# Altium PCB STM_System_Board.PCBDOC (part 15 of 16)
Units mm, origin at the board's own origin, x right, y up, seen from the top; angles counter-clockwise.
Board outline 222.53 x 100.01 mm, 6 copper layers (Top Layer, Int1 (GND), Int2 (Sign), Layer 1, Layer 2, Bottom Layer), stack 1.526 mm thick; 702 components, 774 nets, 3596 pads, 1988 vias.
Unrouted connection lines stored in the file: 1.
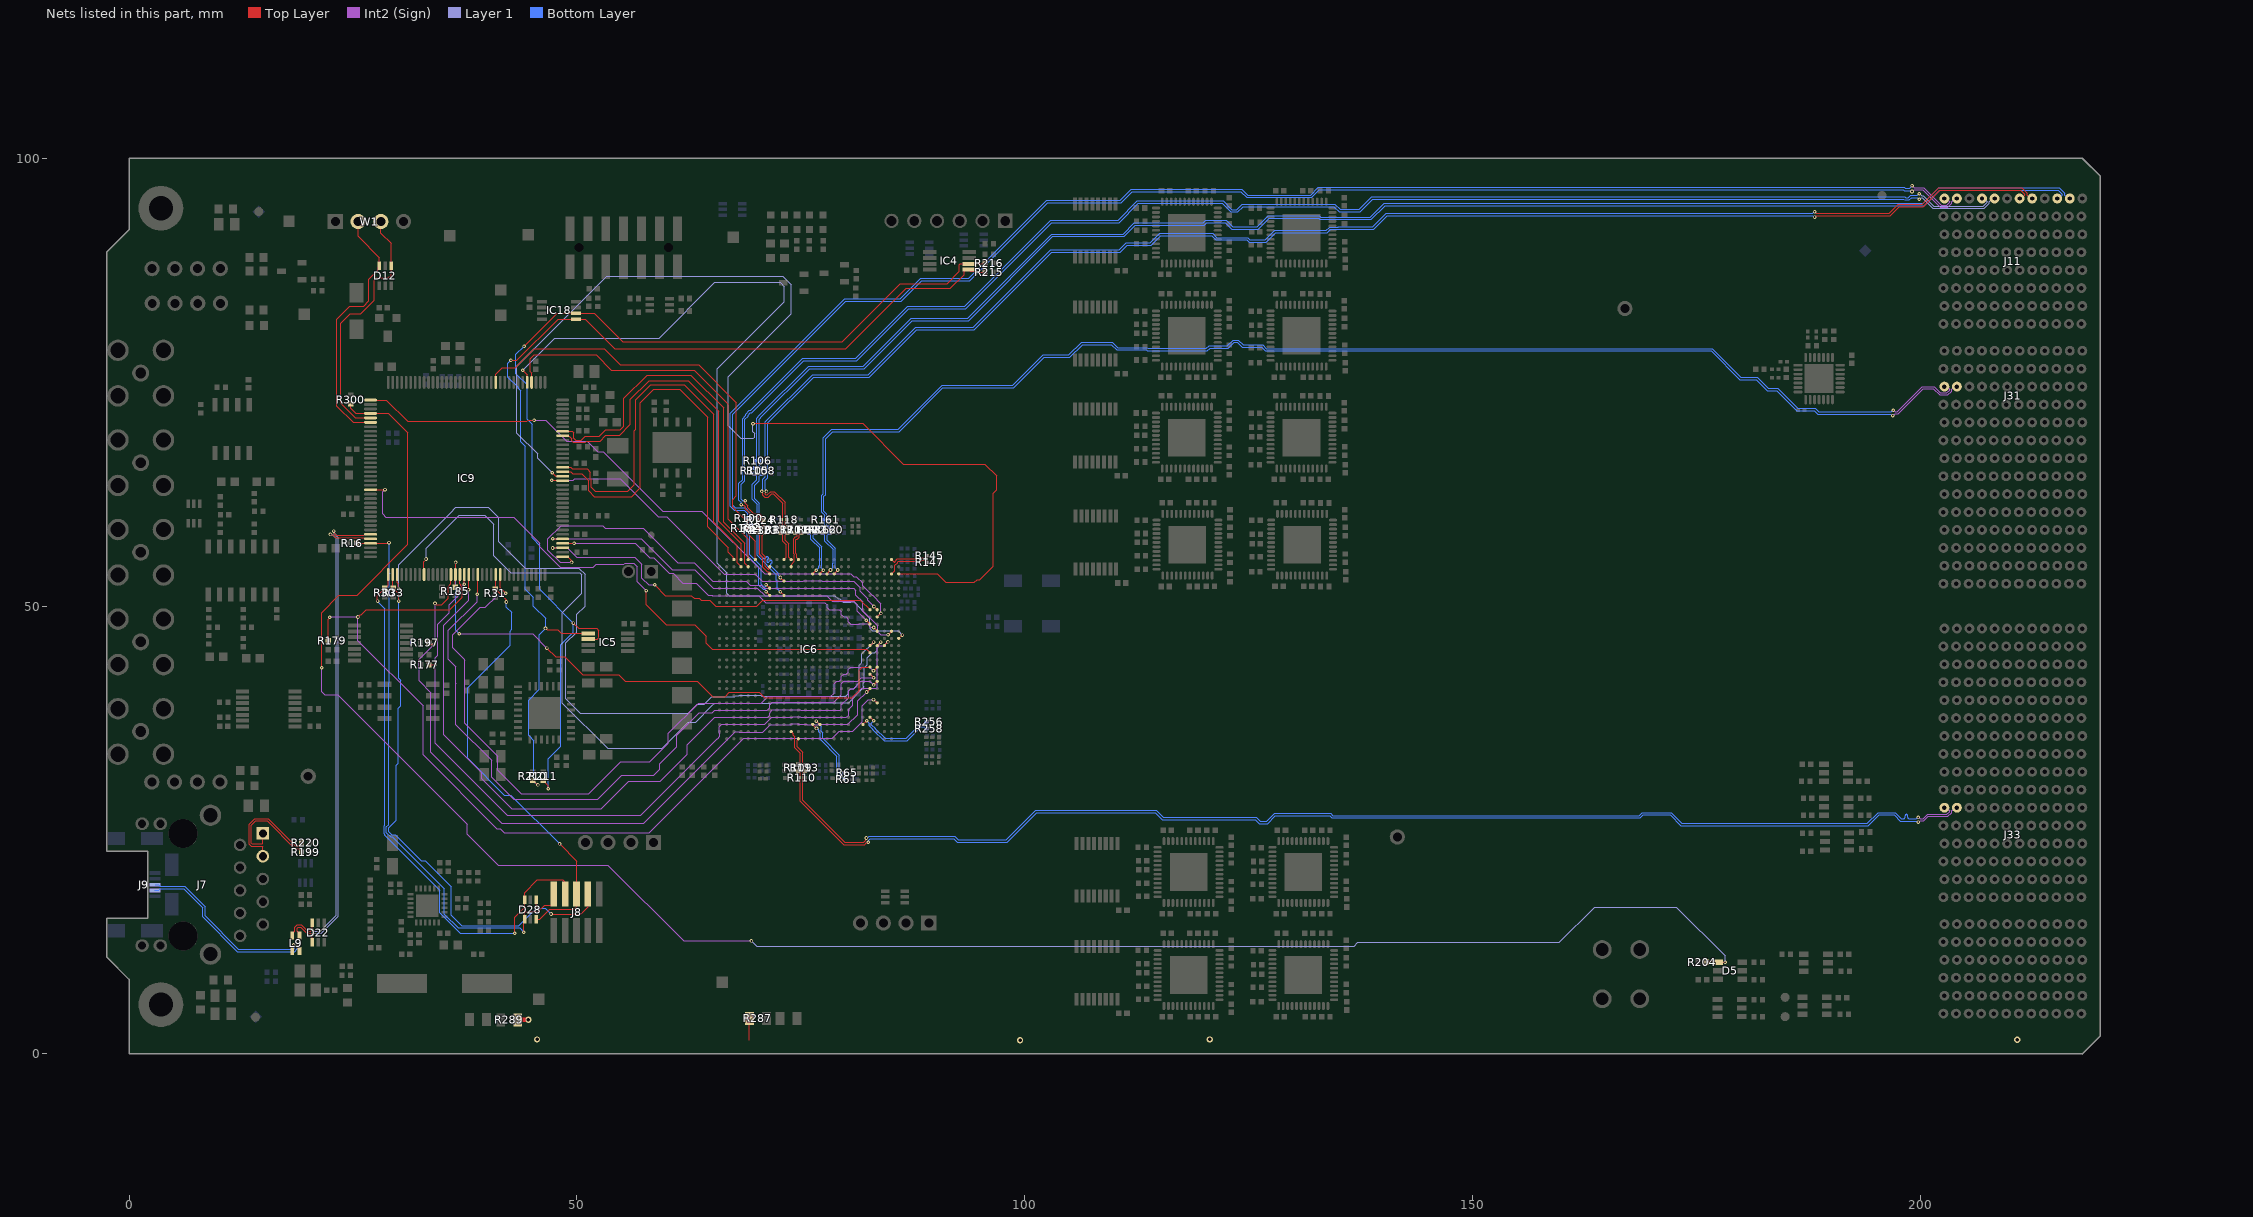
[diagram p18: the nets of this part, all layers, seen from the top]

## Via types
v1: diameter 0.4, hole 0.2, Top Layer to Bottom Layer, tented both sides, 1806 vias
v2: diameter 0.7, hole 0.4, Top Layer to Bottom Layer, tented both sides, 92 vias
v3: diameter 0.7, hole 0.4, Top Layer to Bottom Layer, 90 vias

## Nets (pads, with @x,y where several pads share a name; then routed paths per layer and width w, separated by ;. In a path a pad name is that pad's centre, name@x,y a point inside that pad or via, vN(x,y) a via of type N, cw(c..) or ccw(c..) an arc to the next point about the centre after c; other vN are vias at no path point) (continued)
SLOT8.LVDS_10_N: J31.L4 R161.1 R162.2 | length 147.1
  Int2 (Sign) w0.102: v1(196.925,71.865) 196.968,71.865 197.159,71.675 197.375,71.675 200.19,74.49 201.502,74.49 202.204,73.788 202.93,73.788 203.232,74.09 203.232,74.174 203.172,74.233 203.166,74.233 202.909,74.49 J31.L4@202.639,74.49
  Bottom Layer w0.095: R162.2@77.419,58.828 77.419,58.848 77.582,59.011 77.587,59.011 77.643,59.066 77.643,59.422 77.628,59.436 77.628,59.477 R161.1@77.466,59.64 ; R161.1@77.446,59.64 R161.1@77.466,59.64 ; v1(196.925,71.865) 196.88,71.865 196.708,71.694 188.606,71.694 188.225,72.075 186.25,72.075 184.036,74.289 182.989,74.289 181.735,75.542 179.925,75.542 176.725,78.742 126.962,78.742 126.562,79.142 124.385,79.142 123.84,79.687 123.248,79.687 122.616,79.055 120.558,79.055 120.253,78.749 113.781,78.749 113.678,78.853 110.341,78.853 109.745,79.449 106.324,79.449 104.9,78.026 102.023,78.026 98.623,74.625 90.748,74.625 85.849,69.726 78.449,69.726 77.484,68.761 77.484,62.536 77.3,62.352 77.3,60.483 77.643,60.141 77.643,59.858 77.628,59.844 77.628,59.802 R161.1@77.466,59.64
SLOT8.LVDS_10_P: J31.K4 R160.2 R161.2 | length 147.1
  Int2 (Sign) w0.102: v1(196.867,71.255) 196.948,71.255 197.153,71.461 197.464,71.461 200.279,74.276 201.413,74.276 202.116,73.574 203.018,73.574 203.446,74.001 203.446,74.174 203.505,74.233 203.512,74.233 203.769,74.49 J31.K4@204.039,74.49
  Bottom Layer w0.095: R161.2@78.106,59.64 R161.2@78.086,59.64 ; R160.2@78.189,58.828 78.189,58.848 78.026,59.011 77.993,59.011 77.909,59.094 77.909,59.422 77.923,59.436 77.923,59.477 R161.2@78.086,59.64 ; v1(196.867,71.255) 196.821,71.255 196.65,71.427 188.496,71.427 188.115,71.808 186.139,71.808 183.926,74.022 182.878,74.022 181.625,75.275 179.814,75.275 176.615,78.475 126.851,78.475 126.451,78.875 124.274,78.875 123.729,79.42 123.359,79.42 122.727,78.788 120.669,78.788 120.363,78.482 113.671,78.482 113.567,78.586 110.23,78.586 109.634,79.182 106.434,79.182 105.011,77.759 102.134,77.759 98.733,74.358 90.858,74.358 85.959,69.459 78.559,69.459 77.751,68.651 77.751,62.425 77.567,62.241 77.567,60.594 77.909,60.251 77.909,59.858 77.923,59.844 77.923,59.802 R161.2@78.086,59.64
SLOT8.LVDS_11_N: J11.C8 R106.1 R108.2 | length 163.5
  Bottom Layer w0.095: R106.1@70.519,66.192 R106.1@70.499,66.192 ; R108.2@70.589,65.416 70.589,65.436 70.427,65.599 70.398,65.599 70.322,65.675 70.322,65.974 70.337,65.988 70.337,66.029 R106.1@70.499,66.192 ; J11.C8@215.239,95.49 215.426,95.49 215.805,95.869 215.805,95.948 215.328,96.425 202.125,96.425 200.4,94.7 140.2,94.7 138.658,93.158 132.929,93.158 132.776,93.311 127.286,93.311 126.05,92.075 123.098,92.075 122.371,92.801 120.307,92.801 120.009,92.503 112.328,92.503 111.083,91.258 103.133,91.258 93.708,81.833 87.408,81.833 82.083,76.508 75.958,76.508 70.675,71.225 70.322,70.872 70.322,66.41 70.337,66.396 70.337,66.354 R106.1@70.499,66.192
SLOT8.LVDS_11_P: J11.B8 R105.2 R106.2 | length 164.4
  Bottom Layer w0.095: R105.2@69.828,65.419 69.828,65.439 69.991,65.601 70,65.601 70.056,65.657 70.056,65.974 70.042,65.988 70.042,66.029 R106.2@69.879,66.192 ; R106.2@69.859,66.192 R106.2@69.879,66.192 ; J11.B8@216.639,95.49 216.452,95.49 216.072,95.869 216.072,96.058 215.439,96.692 202.014,96.692 200.29,94.967 140.09,94.967 138.548,93.425 133.039,93.425 132.886,93.578 127.175,93.578 125.939,92.342 123.208,92.342 122.482,93.068 120.196,93.068 119.898,92.77 112.218,92.77 110.973,91.525 103.023,91.525 93.598,82.1 87.298,82.1 81.973,76.775 75.848,76.775 70.408,71.336 70.056,70.983 70.056,66.41 70.042,66.396 70.042,66.354 R106.2@69.879,66.192
SLOT8.LVDS_12_N: J11.F8 R118.1 R120.2 | length 167
  Top Layer w0.095: v1(71.147,62.8) 71.147,62.722 71.017,62.592 71.017,62.458 71.072,62.402 71.236,62.402 71.614,62.78 72.045,62.78 73.248,61.577 73.248,59.839 73.262,59.825 73.262,59.784 R118.1@73.425,59.621 ; R118.1@73.445,59.621 R118.1@73.425,59.621 ; R120.2@73.515,58.83 73.515,58.85 73.353,59.013 73.304,59.013 73.248,59.068 73.248,59.313 73.248,59.403 73.262,59.417 73.262,59.459 R118.1@73.425,59.621 ; v1(188.15,93.42) 188.192,93.42 188.358,93.587 188.437,93.587 188.44,93.584 188.909,93.584 188.91,93.585 188.942,93.585 188.943,93.587 196.614,93.587 197.602,94.575 200.277,94.575 202.102,96.4 211.153,96.4 211.605,95.948 211.605,95.869 211.226,95.49 J11.F8@211.039,95.49
  Bottom Layer w0.095: v1(71.147,62.8) 71.147,62.878 71.017,63.008 71.017,64.033 71.3,64.316 71.3,70.448 76.412,75.559 82.609,75.559 87.908,80.858 94.333,80.858 102.983,89.508 110.658,89.508 111.433,90.283 114.108,90.283 115.15,91.325 120.873,91.325 121.328,90.87 124.753,90.87 125.017,90.606 125.952,90.606 125.963,90.595 126.955,90.595 128.018,91.658 133.758,91.658 134.133,92.033 135.074,92.033 135.09,92.049 138.949,92.049 140.472,93.572 187.942,93.572 188.094,93.42 v1(188.15,93.42)
SLOT8.LVDS_12_P: J11.E8 R117.2 R118.2 | length 167.9
  Top Layer w0.095: v1(70.62,62.8) 70.62,62.722 70.75,62.592 70.75,62.347 70.962,62.135 71.347,62.135 71.725,62.513 71.935,62.513 72.982,61.466 72.982,59.839 72.967,59.825 72.967,59.784 R118.2@72.805,59.621 ; R117.2@72.715,58.83 72.715,58.85 72.878,59.013 72.926,59.013 72.982,59.068 72.982,59.203 72.982,59.403 72.967,59.417 72.967,59.459 R118.2@72.805,59.621 ; R118.2@72.785,59.621 R118.2@72.805,59.621 ; v1(188.15,94.02) 188.192,94.02 188.358,93.853 188.547,93.853 188.55,93.851 188.798,93.851 188.799,93.852 188.832,93.852 188.833,93.853 196.503,93.853 197.492,94.842 200.167,94.842 201.992,96.667 211.264,96.667 211.872,96.058 211.872,95.869 212.252,95.49 J11.E8@212.439,95.49
  Bottom Layer w0.095: v1(70.62,62.8) 70.62,62.878 70.75,63.008 70.75,64.143 71.033,64.427 71.033,70.558 76.301,75.826 82.499,75.826 87.798,81.125 94.223,81.125 102.873,89.775 110.548,89.775 111.323,90.55 113.998,90.55 115.039,91.592 120.983,91.592 121.438,91.137 124.863,91.137 125.128,90.872 126.063,90.872 126.073,90.862 126.844,90.862 127.907,91.925 133.648,91.925 134.023,92.3 134.963,92.3 134.979,92.316 138.839,92.316 140.362,93.839 187.936,93.839 188.117,94.02 v1(188.15,94.02)
SLOT8.LVDS_13_N: J11.I8 R124.1 R130.2 | length 166.3
  Top Layer w0.095: v1(68.35,61.325) 68.398,61.277 68.596,61.277 68.809,61.064 68.809,60.866 69.634,60.041 70.275,60.041 70.37,59.946 70.37,59.812 70.356,59.798 70.356,59.756 R124.1@70.193,59.594 ; R130.2@70.173,58.806 70.173,58.826 70.37,59.023 70.37,59.376 70.356,59.39 70.356,59.431 R124.1@70.193,59.594 ; R124.1@70.173,59.594 R124.1@70.193,59.594
  Layer 1 w0.102: v1(199.825,96.014) 199.863,96.014 200.099,95.777 200.273,95.777 201.45,94.6 206.978,94.6 207.432,95.054 207.432,95.138 207.08,95.49 J11.I8@206.839,95.49
  Bottom Layer w0.095: v1(68.35,61.325) 68.321,61.354 68.321,61.59 68.083,61.827 68.083,63.679 68.482,64.078 68.482,70.932 68.834,71.284 68.834,71.416 69.251,71.833 69.383,71.833 75.189,77.639 81.111,77.639 86.923,83.45 93.273,83.45 102.898,93.075 110.423,93.075 112.564,95.217 122.136,95.217 123.099,94.253 123.651,94.253 124.248,94.85 134.6,94.85 135.175,94.275 137.298,94.275 138.723,95.7 198.22,95.7 198.32,95.6 198.63,95.6 198.863,95.834 199.611,95.834 199.792,96.014 v1(199.825,96.014)
SLOT8.LVDS_13_P: J11.H8 R123.2 R124.2 | length 166.3
  Top Layer w0.095: v1(68.774,61.749) 68.804,61.72 68.804,61.446 69.076,61.174 69.076,60.976 69.744,60.308 70.385,60.308 70.637,60.057 70.637,59.812 70.651,59.798 70.651,59.756 R124.2@70.813,59.594 ; R124.2@70.833,59.594 R124.2@70.813,59.594 ; R123.2@70.91,58.806 70.91,58.826 70.747,58.989 70.731,58.989 70.637,59.083 70.637,59.376 70.651,59.39 70.651,59.431 R124.2@70.813,59.594
  Layer 1 w0.102: v1(199.825,95.414) 199.906,95.414 200.055,95.563 200.184,95.563 201.361,94.386 207.067,94.386 207.646,94.965 207.646,95.138 207.998,95.49 J11.H8@208.239,95.49
  Bottom Layer w0.095: v1(68.774,61.749) 68.745,61.779 68.509,61.779 68.35,61.938 68.35,63.569 68.749,63.968 68.749,70.822 69.1,71.173 69.1,71.305 69.362,71.567 69.494,71.567 75.299,77.372 81.222,77.372 87.033,83.183 93.383,83.183 103.008,92.808 110.533,92.808 112.675,94.95 122.025,94.95 122.989,93.986 123.761,93.986 124.358,94.583 134.489,94.583 135.064,94.008 137.408,94.008 138.833,95.433 198.11,95.433 198.209,95.334 198.741,95.334 198.974,95.567 199.617,95.567 199.769,95.414 v1(199.825,95.414)
SLOT8.LVDS_14_N: J11.L8 R100.1 R102.2 | length 163.3
  Int2 (Sign) w0.102: v1(199.04,96.918) 199.046,96.918 199.275,96.689 200.314,96.689 202.278,94.725 202.903,94.725 203.232,95.054 203.232,95.138 202.88,95.49 J11.L8@202.639,95.49
  Bottom Layer w0.095: R102.2@68.801,59.026 68.801,59.046 68.964,59.208 68.97,59.208 69.042,59.28 69.042,59.584 69.028,59.598 69.028,59.64 R100.1@68.865,59.802 ; R100.1@68.845,59.802 R100.1@68.865,59.802 ; v1(199.04,96.918) 198.747,96.625 198.275,96.625 198.158,96.742 132.764,96.742 131.898,95.875 124.85,95.875 124.209,96.516 111.864,96.516 110.623,95.275 102.423,95.275 93.723,86.575 88.398,86.575 86.114,84.292 79.892,84.292 67.108,71.508 67.108,61.114 67.539,60.684 68.651,60.684 69.042,60.292 69.042,60.02 69.028,60.006 69.028,59.965 R100.1@68.865,59.802
SLOT8.LVDS_14_P: J11.K8 R94.2 R100.2 | length 163
  Int2 (Sign) w0.102: v1(199.029,96.275) 199.075,96.275 199.275,96.475 200.225,96.475 202.189,94.511 202.992,94.511 203.446,94.965 203.446,95.138 203.798,95.49 J11.K8@204.039,95.49
  Bottom Layer w0.095: R94.2@69.517,59.026 69.517,59.046 69.309,59.254 69.309,59.584 69.323,59.598 69.323,60.006 69.309,60.02 69.309,60.403 68.761,60.951 67.65,60.951 67.375,61.225 67.375,71.398 80.002,84.025 86.225,84.025 88.508,86.308 93.833,86.308 102.533,95.008 110.733,95.008 111.974,96.25 124.098,96.25 124.739,95.608 132.008,95.608 132.875,96.475 198.048,96.475 198.164,96.359 198.82,96.359 198.846,96.333 198.97,96.333 v1(199.029,96.275)
SLOT8.LVDS_15_N: J33.L6 R110.1 R113.2 | length 139.8
  Top Layer w0.095: R110.1@75.396,30.819 R110.1@75.376,30.819 ; R113.2@75.443,31.61 75.443,31.59 75.28,31.427 75.255,31.427 75.199,31.372 75.199,31.037 75.214,31.023 75.214,30.981 R110.1@75.376,30.819 ; v1(82.308,24.105) 82.25,24.047 82.25,23.88 81.995,23.625 79.875,23.625 75.199,28.301 75.199,30.601 75.214,30.615 75.214,30.656 R110.1@75.376,30.819
  Int2 (Sign) w0.102: v1(199.725,26.407) 199.806,26.407 199.962,26.25 200.272,26.25 200.761,26.739 202.917,26.739 203.225,27.046 203.225,27.131 202.865,27.49 J33.L6@202.639,27.49
  Bottom Layer w0.095: v1(82.308,24.105) 82.367,24.164 82.52,24.164 82.648,24.292 92.15,24.292 92.542,23.9 97.923,23.9 101.223,27.2 114.675,27.2 115.45,26.425 125.845,26.425 126.295,25.975 126.998,25.975 127.864,26.841 134.131,26.841 134.355,26.617 168.592,26.617 168.916,26.941 172.159,26.941 173.35,25.75 194.048,25.75 195.238,26.941 197.159,26.941 197.833,26.267 198.05,26.267 198.098,26.267 ccw(c198.098,26.414) 198.245,26.414 198.245,26.591 cw(c198.393,26.591) 198.54,26.591 198.54,26.414 ccw(c198.688,26.414) 198.688,26.267 198.69,26.267 199.2,26.267 199.517,26.267 199.657,26.407 v1(199.725,26.407)
SLOT8.LVDS_15_P: J33.K6 R109.2 R110.2 | length 139.9
  Top Layer w0.095: R109.2@74.678,31.617 74.678,31.597 74.841,31.434 74.87,31.434 74.933,31.372 74.933,31.037 74.919,31.023 74.919,30.981 R110.2@74.756,30.819 ; R110.2@74.736,30.819 R110.2@74.756,30.819 ; v1(82.525,23.625) 82.467,23.567 82.314,23.567 82.105,23.358 79.764,23.358 74.933,28.19 74.933,30.601 74.919,30.615 74.919,30.656 R110.2@74.756,30.819
  Int2 (Sign) w0.102: v1(199.725,25.88) 199.806,25.88 199.962,26.036 200.361,26.036 200.85,26.525 203.026,26.525 203.453,26.952 203.453,27.131 203.813,27.49 J33.K6@204.039,27.49
  Bottom Layer w0.095: v1(82.525,23.625) 82.583,23.683 82.583,23.85 82.758,24.025 92.039,24.025 92.431,23.633 98.033,23.633 101.333,26.933 114.565,26.933 115.339,26.158 125.735,26.158 126.185,25.708 127.108,25.708 127.975,26.575 134.02,26.575 134.245,26.35 168.702,26.35 169.026,26.674 172.049,26.674 173.239,25.483 194.158,25.483 195.349,26.674 197.049,26.674 197.723,26 198.8,26 199.522,26 199.642,25.88 v1(199.725,25.88)
SLOT8.LVDSr0_N: IC6.F24 R258.1 | length 9.1
  Top Layer w0.095: IC6.F24@81.915,36.784 v1@82.321,37.19
  Bottom Layer w0.095: v1(82.341,37.19) 82.341,37.187 82.607,36.921 82.607,36.648 83.026,36.229 83.026,36.206 84.281,34.95 86.849,34.95 88.45,36.551 88.78,36.551 88.836,36.496 88.836,36.461 88.998,36.299 R258.1@89.018,36.299
SLOT8.LVDSr0_P: IC6.E23 R256.1 | length 8.7
  Top Layer w0.095: IC6.E23@82.74,37.584 v1(83.14,37.184)
  Bottom Layer w0.095: v1(83.14,37.184) 83.137,37.184 82.874,36.921 82.874,36.758 83.292,36.339 83.292,36.316 84.392,35.217 86.738,35.217 88.34,36.818 88.78,36.818 88.836,36.874 88.836,36.908 88.998,37.07 R256.1@89.018,37.07
SLOT8.LVDSr1_N: IC6.M24 R65.1 | length 8.1
  Top Layer w0.095: v1(76.718,37.15) IC6.M24@77.084,36.784
  Bottom Layer w0.095: v1(76.718,37.15) 76.718,37.132 77.248,36.602 77.248,36.05 77.425,35.873 77.425,35.229 79.292,33.362 79.292,31.307 79.445,31.153 79.587,31.153 79.798,31.364 R65.1@79.818,31.364
SLOT8.LVDSr1_P: IC6.N24 R61.1 | length 7.8
  Top Layer w0.095: IC6.N24@76.315,36.761 v1(76.738,36.338)
  Bottom Layer w0.095: v1(76.738,36.338) 76.82,36.338 76.914,36.245 76.982,36.245 76.982,35.939 77.158,35.762 77.158,35.119 79.025,33.252 79.025,31.196 79.335,30.886 79.554,30.886 79.61,30.831 79.61,30.815 79.772,30.653 R61.1@79.792,30.653
SLOT8.LVDSr3_N: IC6.B3 R147.1 | length 5
  Top Layer w0.095: IC6.B3@85.115,53.584 85.48,53.949 85.48,54.537 85.794,54.851 85.794,54.909 85.869,54.983 88.348,54.983 88.466,55.101 88.789,55.101 88.845,55.045 88.845,55.029 89.007,54.866 R147.1@89.027,54.866
SLOT8.LVDSr3_P: IC6.B1 R145.1 | length 4.4
  Top Layer w0.095: IC6.B1@85.115,55.184 85.393,54.906 85.472,54.906 85.527,54.962 85.527,55.019 85.758,55.25 88.237,55.25 88.355,55.368 88.789,55.368 88.845,55.423 88.845,55.44 89.007,55.603 R145.1@89.027,55.603
SLOT8.LVDSr8_N: IC6.R1 R114.1 | length 3.4
  Top Layer w0.095: IC6.R1@74.715,55.184 74.531,55.367 74.531,55.836 74.448,55.919 74.448,57.394 74.504,57.449 74.578,57.449 74.829,57.701 74.829,57.945 74.885,58.001 74.908,58.001 75.071,58.164 R114.1@75.071,58.184
SLOT8.LVDSr8_P: IC6.T2 R111.1 | length 4.3
  Top Layer w0.095: IC6.T2@73.915,54.384 73.964,54.433 73.964,54.679 74.264,54.98 74.264,55.726 74.182,55.808 74.182,57.504 74.393,57.716 74.467,57.716 74.562,57.811 74.562,57.945 74.507,58.001 74.483,58.001 74.321,58.164 R111.1@74.321,58.184
SLOT8.LVDSr9_N: IC6.M3 R72.1 | length 5.4
  Top Layer w0.095: IC6.M3@77.115,53.584 v1(77.515,53.984)
  Bottom Layer w0.095: R72.1@76.647,58.175 76.647,58.155 76.484,57.993 76.446,57.993 76.39,57.937 76.39,57.56 77.341,56.609 77.341,54.438 77.248,54.345 77.248,54.251 v1(77.515,53.984)
SLOT8.LVDSr9_P: IC6.N3 R69.1 | length 5.4
  Top Layer w0.095: IC6.N3@76.315,53.584 v1(76.715,53.984)
  Bottom Layer w0.095: R69.1@75.864,58.17 75.864,58.15 76.027,57.988 76.068,57.988 76.123,57.932 76.123,57.449 77.074,56.498 77.074,54.548 76.982,54.455 76.982,54.251 v1(76.715,53.984)
SLOT8.LVDSr10_N: IC6.L3 R162.1 | length 5.4
  Top Layer w0.095: IC6.L3@77.915,53.584 78.3,53.969 v1(78.3,54.025)
  Bottom Layer w0.095: R162.1@77.419,58.168 77.419,58.148 77.582,57.986 77.615,57.986 77.671,57.93 77.671,57.254 78.582,56.343 78.582,54.785 78.567,54.77 78.567,54.292 v1(78.3,54.025)
SLOT8.LVDSr10_P: IC6.K3 R160.1 | length 5.4
  Top Layer w0.095: IC6.K3@78.715,53.584 79.1,53.969 v1(79.1,54.025)
  Bottom Layer w0.095: R160.1@78.189,58.168 78.189,58.148 78.026,57.986 77.993,57.986 77.937,57.93 77.937,57.365 78.848,56.454 78.848,54.674 78.833,54.659 78.833,54.292 v1(79.1,54.025)
SLOT8.LVDSr11_N: IC6.U4 R108.1 | length 15
  Top Layer w0.095: v1(72.713,53.184) 72.715,53.184 IC6.U4@73.115,52.784
  Bottom Layer w0.095: R108.1@70.589,64.756 70.589,64.736 70.427,64.574 70.397,64.574 70.342,64.518 70.342,63.981 69.825,63.465 69.825,62.002 70.375,61.452 70.375,55.76 70.592,55.542 70.626,55.509 70.799,55.336 ccw(c70.903,55.441) 71.007,55.336 71.132,55.461 cw(c71.236,55.357) 71.341,55.461 cw(c71.236,55.357) 71.341,55.252 71.216,55.128 ccw(c71.32,55.023) 71.216,54.919 ccw(c71.32,55.023) 71.424,54.919 71.549,55.044 cw(c71.653,54.939) 71.758,55.044 cw(c71.653,54.939) 71.758,54.835 71.633,54.71 ccw(c71.737,54.606) 71.633,54.502 72.259,53.876 72.292,53.842 72.54,53.595 72.54,53.392 72.713,53.22 v1(72.713,53.184)
SLOT8.LVDSr11_P: IC6.U6 R105.1 | length 15.4
  Top Layer w0.095: v1(72.715,51.584) IC6.U6@73.115,51.184
  Bottom Layer w0.095: R105.1@69.828,64.759 69.828,64.739 69.991,64.576 70.019,64.576 70.075,64.521 70.075,64.092 69.558,63.575 69.558,61.892 70.108,61.342 70.108,55.649 72.273,53.484 72.273,52.901 72.349,52.825 72.349,51.95 v1(72.715,51.584)
SLOT8.LVDSr12_N: IC6.T1 R120.1 | length 3.4
  Top Layer w0.095: R120.1@73.515,58.17 73.515,58.15 73.353,57.988 73.304,57.988 73.248,57.932 73.248,57.352 73.648,56.952 73.648,55.451 IC6.T1@73.915,55.184
SLOT8.LVDSr12_P: IC6.U1 R117.1 | length 3.4
  Top Layer w0.095: R117.1@72.715,58.17 72.715,58.15 72.878,57.988 72.926,57.988 72.982,57.932 72.982,57.241 73.382,56.841 73.382,55.451 IC6.U1@73.115,55.184
SLOT8.LVDSr13_N: IC6.W3 R130.1 | length 5.2
  Top Layer w0.095: R130.1@70.173,58.146 70.173,58.126 70.336,57.964 70.352,57.964 70.408,57.908 70.408,55.717 70.733,55.392 70.733,54.339 71.222,53.851 71.411,53.851 71.467,53.795 71.467,53.632 IC6.W3@71.515,53.584
SLOT8.LVDSr13_P: IC6.W2 R123.1 | length 4.8
  Top Layer w0.095: R123.1@70.91,58.146 70.91,58.126 70.747,57.964 70.73,57.964 70.675,57.908 70.675,55.827 71,55.502 71,54.45 71.333,54.117 71.411,54.117 71.467,54.173 71.467,54.336 IC6.W2@71.515,54.384
SLOT8.LVDSr14_N: IC6.W6 R102.1 | length 8.4
  Top Layer w0.095: v1(71.115,51.584) IC6.W6@71.515,51.184
  Bottom Layer w0.095: R102.1@68.801,58.366 68.801,58.346 68.964,58.183 68.97,58.183 69.026,58.128 69.026,55.597 70.301,54.322 70.301,52.336 70.787,51.851 70.976,51.851 71.057,51.77 71.057,51.642 v1(71.115,51.584)
SLOT8.LVDSr14_P: IC6.W5 R94.1 | length 8
  Top Layer w0.095: v1(71.115,52.384) IC6.W5@71.515,51.984 IC6.W5@71.562,51.936
  Bottom Layer w0.095: R94.1@69.517,58.366 69.517,58.346 69.355,58.183 69.348,58.183 69.293,58.128 69.293,55.707 70.568,54.432 70.568,52.447 70.897,52.117 70.976,52.117 71.057,52.198 71.057,52.326 v1(71.115,52.384)
SLOT8.LVDSr15_N: IC6.R26 R113.1 | length 3.3
  Top Layer w0.095: IC6.R26@74.715,35.184 74.715,35.139 74.577,35.001 74.577,34.286 75.198,33.666 75.198,32.508 75.253,32.452 75.28,32.452 75.443,32.29 R113.1@75.443,32.27
SLOT8.LVDSr15_P: IC6.T25 R109.1 | length 4.3
  Top Layer w0.095: IC6.T25@73.915,35.984 73.915,35.962 74.128,35.748 74.128,35.589 74.31,35.407 74.31,34.176 74.931,33.555 74.931,32.515 74.875,32.459 74.841,32.459 74.678,32.297 R109.1@74.678,32.277
SPI1_MISO: IC6.E16 IC9.124 R185.2 | length 62.9
  Top Layer w0.127: R185.2@36.435,52.099 IC9.124@36.435,53.521 36.442,53.528 36.442,54.857 v1(36.449,54.864) ; v1(46.65,45.3) 47.625,44.325 48.626,44.325 50.626,42.325 54.675,42.325 55.4,41.6 63.425,41.6 65.15,39.875 66.55,39.875 67.025,40.35 68.142,40.35 68.157,40.365 70.36,40.365 70.975,39.75 80.7,39.75 81.515,40.565 81.515,42.84 81.859,43.184 IC6.E16@82.715,43.184
  Int2 (Sign) w0.127: v1(36.85,46.9) 45.05,46.9 v1(46.65,45.3)
  Bottom Layer w0.127: v1(36.449,54.864) 36.449,47.301 v1(36.85,46.9)
SPI1_MOSI: IC6.E19 IC9.123 R197.2 | length 82.7
  Top Layer w0.127: R197.2@33.466,45.876 33.622,45.72 v1(34.045,45.72) ; v1(34.154,50.292) 34.154,50.239 34.228,50.165 34.925,50.165 35.621,50.861 35.621,52.154 35.935,52.468 IC9.123@35.935,53.521 ; v1(82.325,40.4) 82.331,40.4 IC6.E19@82.715,40.784
  Int2 (Sign) w0.127: v1(34.154,50.292) 34.154,45.902 34.045,45.794 v1(34.045,45.72) 32.375,44.05 32.375,41.65 33.7,40.325 33.7,33.7 41.625,25.775 57.475,25.775 67.675,35.975 68.077,35.975 68.126,35.925 70.725,35.925 71.575,36.775 73.875,36.775 73.95,36.85 74.675,36.85 74.725,36.8 75.637,36.8 75.713,36.725 76.625,36.725 76.629,36.729 76.775,36.729 76.778,36.732 76.852,36.732 76.894,36.775 76.95,36.775 76.969,36.794 80.244,36.794 81.325,37.875 81.325,39.4 v1(82.325,40.4)
SPI1_NSS: IC6.D21 IC9.125 R179.2 | length 101.2
  Top Layer w0.127: R179.2@22.239,46.13 22.239,48.517 22.404,48.683 v1(22.404,48.757) ; v1(25.543,48.778) 25.564,48.778 25.83,49.044 25.919,49.044 26.475,49.599 35.809,49.599 37.211,51.001 37.211,52.087 37.035,52.263 37.035,52.369 36.935,52.468 IC9.125@36.935,53.521 ; v1(83.1,39.55) 83.156,39.55 IC6.D21@83.516,39.19
  Int2 (Sign) w0.127: v1(22.404,48.757) 22.426,48.778 v1(25.543,48.778) ; v1@25.654,48.778 v1(25.543,48.778) ; v1(83.1,39.55) 82.529,39.55 81.85,38.871 81.85,37.075 80.775,36 79.283,36 78.518,35.235 68.61,35.235 58.075,24.7 41.892,24.7 41.437,25.155 41.045,25.155 32.825,33.375 32.825,38.85 25.543,46.133 v1(25.543,48.778)
SPI1_SCK: IC6.C13 IC9.126 R177.2 | length 87.5
  Top Layer w0.127: R177.2@33.495,43.425 v1(34.175,43.425) ; v1(37.425,52.425) 37.425,53.511 IC9.126@37.435,53.521 ; IC6.C13@84.315,45.609 v1(84.706,46)
  Int2 (Sign) w0.127: v1(37.425,52.425) 36.812,51.812 36.812,51.213 35.754,50.154 35.754,49.27 34.436,47.952 34.436,44.505 34.175,44.244 v1(34.175,43.425) 34.175,34.675 42.2,26.65 57.1,26.65 65.66,35.21 65.693,35.21 65.921,35.438 65.921,35.762 65.905,35.778 65.905,36.527 66.172,36.794 70.965,36.794 71.747,37.576 72.026,37.576 72.057,37.606 73.316,37.606 73.338,37.584 74.082,37.584 74.163,37.665 74.907,37.665 74.982,37.59 77.16,37.59 77.166,37.584 80.087,37.584 80.325,37.823 80.325,38.45 80.8,38.925 80.8,39.825 81.775,40.8 83.426,40.8 83.515,40.89 83.515,41.477 83.505,41.487 83.505,45.308 83.748,45.55 84.256,45.55 v1(84.706,46)
SPI2_MISO: IC6.AC1 IC9.28 | length 41.4
  Top Layer w0.127: IC9.28@48.402,68.987 IC9.28@48.41,68.996 49.032,68.996 49.099,68.929 49.146,68.929 49.4,68.675 49.4,68.425 49.558,68.267 50.942,68.267 51.075,68.4 52.575,68.4 53.225,69.05 54.75,69.05 55.975,70.275 55.975,73.075 58.05,75.15 62.4,75.15 65.825,71.725 65.825,59.45 68.315,56.96 IC6.AC1@68.315,55.184
SPI2_MOSI: IC6.AB2 IC9.29 | length 43.9
  Top Layer w0.127: IC9.29@48.397,69.483 IC9.29@48.41,69.496 49.479,69.496 49.65,69.325 49.65,68.75 49.879,68.521 50.471,68.521 50.925,68.975 52.5,68.975 53.2,69.675 54.819,69.675 55.225,70.081 55.225,73.175 57.825,75.775 62.725,75.775 66.375,72.125 66.375,59.375 68.725,57.025 68.725,54.774 IC6.AB2@69.115,54.384
SPI2_NSS: IC6.D9 IC9.73 | length 68.3
  Top Layer w0.127: IC9.73@26.96,72.996 28.731,72.996 31.115,70.612 33.357,70.612 33.366,70.603 44.422,70.603 44.558,70.739 v1(45.212,70.739) ; IC6.D9@83.54,48.784 v1(83.931,49.175)
  Int2 (Sign) w0.127: v1(45.212,70.739) 46.511,70.739 48.85,68.4 51.125,68.4 52.315,67.209 52.941,67.209 59.55,60.6 63.944,60.6 70.95,53.594 78.147,53.594 78.153,53.6 80.547,53.6 ; 80.553,53.594 80.886,53.261 81.189,53.261 81.873,52.577 81.873,52.273 82.05,52.097 82.05,52.079 82.944,51.185 82.99,51.185 83.931,50.244 v1(83.931,49.175)
SPI2_SCK: IC6.D13 IC9.117 | length 87.2
  Top Layer w0.127: IC9.117@32.935,53.521 32.914,53.542 32.914,54.935 33.156,55.177 v1(33.156,55.245) ; IC6.D13@83.515,45.584 v1(83.906,45.975)
  Layer 1 w0.127: v1(33.156,55.245) 33.156,56.456 36.85,60.15 39.7,60.15 40.725,59.125 40.725,55.625 42.625,53.725 49.871,53.725 49.876,53.73 50.294,53.73 50.55,53.475 50.55,51.4 48.375,49.225 48.375,39.175 53.45,34.1 59.5,34.1 62.425,37.025 63.25,37.025 65.124,38.899 65.124,38.946 65.353,39.175 71.721,39.175 71.774,39.227 80.352,39.227 82.034,40.909 82.034,41.014 81.984,41.063 81.984,41.387 82.075,41.477 82.075,43.125 82.4,43.45 82.4,44.225 82.984,44.809 83.268,44.809 83.496,45.038 83.496,45.565 v1(83.906,45.975)
SPI3_MISO: IC6.D16 IC9.134 | length 78.6
  Top Layer w0.127: IC9.134@41.435,53.521 41.435,52.04 v1(42.05,51.425) ; v1(83.1,42.775) 83.106,42.775 IC6.D16@83.515,43.184
  Int2 (Sign) w0.127: 37.118,44.332 36.125,45.325 36.125,46.775 39.186,49.836 39.738,49.836 41.075,51.173 41.798,51.173 v1(42.05,51.425) ; 37.119,44.332 37.347,44.104 ; 37.347,44.103 37.5,43.95 37.5,36.925 41.175,33.25 41.175,31.675 43.8,29.05 51.3,29.05 54.875,32.625 58.125,32.625 60.2,34.7 60.2,35.775 63.6,39.175 70.575,39.175 71.325,39.925 78.35,39.925 78.705,40.28 78.705,41.327 78.972,41.594 79.277,41.594 79.524,41.841 79.524,42.146 79.763,42.384 80.067,42.384 80.305,42.622 80.305,42.953 80.546,43.194 82.681,43.194 v1(83.1,42.775)
SPI3_MOSI: IC6.AA1 IC9.48 | length 50.2
  Top Layer w0.127: IC9.48@40.935,74.971 40.935,75.885 41.65,76.6 43.1,76.6 45.225,78.725 53.025,78.725 54.825,76.925 63.575,76.925 67.8,72.7 67.8,62.3 67.375,61.875 67.375,61.05 69.125,59.3 69.125,58.025 69.915,57.235 IC6.AA1@69.915,55.184
SPI3_NSS: IC6.AB1 IC9.40 | length 45.5
  Top Layer w0.127: IC9.40@44.935,74.971 44.935,76.025 44.8,76.16 44.8,77.629 45.221,78.05 52.125,78.05 53.85,76.325 63.075,76.325 66.9,72.5 66.9,59.675 69.115,57.46 IC6.AB1@69.115,55.184
SPI3_SCK: IC6.E13 IC9.111 | length 87.9
  Top Layer w0.127: IC9.111@29.935,53.521 29.935,52.595 30.07,52.46 v1@30.07,52.116 ; IC6.E13@82.715,45.584 v1(83.106,45.975)
  Layer 1 w0.127: v1(30.116,51.943) 30.09,51.969 30.09,54.614 36.186,60.71 36.186,60.741 36.495,61.05 40.075,61.05 41.25,59.875 41.25,57.2 44.225,54.225 50.225,54.225 50.925,53.525 50.925,50 49.99,49.066 49.99,47.091 48.775,45.875 48.775,39.625 50.35,38.05 62.414,38.05 63.421,39.057 64.232,39.057 65.025,39.85 67.629,39.85 67.753,39.974 68.058,39.974 68.098,40.014 70.52,40.014 70.609,39.925 80.008,39.925 80.305,40.222 80.305,40.527 80.572,40.794 80.877,40.794 81.515,41.432 81.515,43.39 81.805,43.68 81.805,44.675 v1(83.106,45.975)
SPI4_CLK: IC6.B11 IC9.1 | length 51.3
  Top Layer w0.127: IC9.1@48.41,55.496 48.985,55.496 49.351,55.131 49.351,54.916 v1(49.403,54.864) ; v1(84.731,46.8) IC6.B11@85.115,47.184
  Int2 (Sign) w0.127: v1(49.403,54.864) 48.136,54.864 46.75,56.25 46.75,57.502 48.223,58.975 52.9,58.975 53.175,58.7 57.375,58.7 61.25,54.825 63.1,54.825 65.15,52.775 68.876,52.775 69.326,52.325 70.575,52.325 70.911,51.989 72.557,51.989 72.572,51.975 72.877,51.975 72.892,51.959 74.138,51.959 74.153,51.975 80.877,51.975 81.125,51.726 81.125,51.2 81.875,50.45 81.875,49.5 83.55,47.825 83.55,47.15 83.9,46.8 v1(84.731,46.8)
SPI4_MISO: IC6.D11 IC9.4 | length 39.7
  Top Layer w0.127: IC9.4@48.411,56.997 v1@49.678,56.997 ; v1(83.125,47.606) IC6.D11@83.516,47.215
  Int2 (Sign) w0.127: v1(49.679,56.997) 56.503,56.997 58.125,55.375 58.55,55.375 60.275,53.65 60.725,53.65 61.834,52.541 63.324,52.541 64.639,51.225 65.075,51.225 65.125,51.175 70.275,51.175 71.075,50.374 77.677,50.374 77.924,50.127 77.924,49.822 78.172,49.575 79.277,49.575 79.515,49.336 79.515,49.032 79.753,48.794 80.058,48.794 80.305,48.546 80.305,48.241 80.553,47.994 81.506,47.994 81.509,47.996 82.462,47.996 82.691,47.768 82.691,47.71 82.794,47.606 v1(83.125,47.606)
SPI4_MOSI: IC6.E10 IC9.5 | length 40.9
  Top Layer w0.127: v1(47.3,57.5) 47.304,57.496 IC9.5@48.41,57.496 ; v1(82.3,48.406) IC6.E10@82.691,48.015
  Int2 (Sign) w0.127: v1(47.3,57.5) 57.175,57.5 60.65,54.025 63.175,54.025 65.225,51.975 68.077,51.975 68.101,51.95 68.325,51.95 68.35,51.975 70.15,51.975 71,51.125 77.875,51.125 78.475,50.525 80.875,50.525 81.275,50.125 81.275,49.431 v1(82.3,48.406)
SPI4_NSS: IC6.E8 IC9.3 | length 40.9
  Top Layer w0.127: v1(47.275,56.475) 47.3,56.5 48.407,56.5 IC9.3@48.41,56.496 ; v1(58.675,52.375) 59.875,51.175 62.775,51.175 63.065,50.885 63.641,50.885 63.9,50.625 64.825,50.625 65.475,49.975 70.045,49.975 70.72,50.65 81.649,50.65 IC6.E8@82.715,49.584
  Int2 (Sign) w0.127: v1(47.275,56.475) 47.3,56.5 48.925,56.5 49.975,55.45 56.45,55.45 57.25,54.65 57.25,53.122 57.997,52.375 v1(58.675,52.375)
SPI5_MISO: IC6.AD1 IC9.20 | length 46.9
  Top Layer w0.127: IC9.20@48.396,65.01 IC9.20@48.41,64.996 49.329,64.996 49.55,64.775 50.55,64.775 51.325,64 51.325,63.589 ; 51.325,63.589 51.325,62.85 51.95,62.225 56.1,62.225 57.075,63.2 57.075,72.675 58.575,74.175 61.475,74.175 64.6,71.05 64.6,58.825 66.9,56.525 66.9,56.025 67.472,55.453 67.472,55.227 IC6.AD1@67.515,55.184
SPI5_MOSI: IC6.AC2 IC9.21 | length 49
  Top Layer w0.127: IC9.21@48.392,65.514 IC9.21@48.41,65.496 49.304,65.496 49.5,65.3 51.125,65.3 51.5,64.925 51.5,64.184 51.579,64.105 51.579,63.695 ; 51.579,63.694 51.579,63.246 52.025,62.8 55.65,62.8 56.4,63.55 56.4,69.575 56.55,69.725 56.55,73.025 58.25,74.725 61.95,74.725 65.25,71.425 65.25,59.35 67.88,56.72 67.88,54.819 IC6.AC2@68.315,54.384
SPI5_NSS: IC6.D8 IC9.18 | length 44.1
  Top Layer w0.127: v1(47.178,64.033) 47.196,64.015 48.392,64.015 IC9.18@48.41,63.996 ; v1(83.15,49.95) IC6.D8@83.515,49.584
  Int2 (Sign) w0.127: v1(47.178,64.033) 49.581,64.033 49.763,64.216 54.835,64.216 59.075,59.975 60.025,59.975 66.425,53.575 68.877,53.575 68.892,53.559 69.916,53.559 70.701,52.774 74.12,52.774 74.136,52.79 75.268,52.79 75.293,52.816 77.331,52.816 77.353,52.794 79.235,52.794 79.253,52.775 80.9,52.775 81.625,52.05 81.625,51.65 82.475,50.8 82.475,50.625 v1(83.15,49.95)
SPI5_SCK: IC6.A3 IC9.19 | length 125.5
  Top Layer w0.127: v1(47.25,64.875) 47.618,64.507 48.4,64.507 IC9.19@48.41,64.496 ; v1(69.65,70.35) 69.702,70.402 69.838,70.402 69.861,70.425 81.875,70.425 86.45,65.85 95.525,65.85 96.85,64.525 96.85,63 96.45,62.6 96.45,54.425 94.98,52.955 94.68,52.955 94.362,52.637 91.162,52.637 90.216,53.584 IC6.A3@85.915,53.584
  Layer 1 w0.127: v1(47.25,64.875) 45.612,66.513 45.612,66.988 43.3,69.3 43.3,76.764 53.336,86.8 72.95,86.8 73.9,85.85 73.9,82.6 66.9,75.6 66.9,70.1 68.291,68.709 69.684,68.709 69.841,68.866 69.841,69.262 69.65,69.452 v1(69.65,70.35) v1@69.598,70.402
SPI6_MISO: IC6.D18 IC9.127 | length 79
  Top Layer w0.127: v1(37.9,51.825) 37.925,51.85 37.925,53.511 IC9.127@37.935,53.521 ; v1(83.125,41.2) 83.509,41.584 IC6.D18@83.515,41.584
  Int2 (Sign) w0.127: v1(37.9,51.825) 37.9,50.625 35.15,47.875 35.15,35.642 39.377,31.415 39.377,30.723 42.725,27.375 52.725,27.375 55.8,30.45 59.275,30.45 62.3,33.475 62.3,34.5 65.394,37.594 71.277,37.594 71.505,37.822 71.505,38.03 71.55,38.075 71.55,38.152 71.808,38.41 73.637,38.41 73.674,38.446 74.926,38.446 74.982,38.39 76.532,38.39 76.538,38.385 79.379,38.385 79.516,38.521 79.516,38.965 80.324,39.774 80.324,40.546 80.572,40.794 80.877,40.794 81.699,41.615 82.709,41.615 v1(83.125,41.2)
SPI6_MOSI: IC6.E17 IC9.129 | length 77.9
  Top Layer w0.127: v1(38.862,51.308) 38.902,51.348 38.902,53.488 IC9.129@38.935,53.521 ; IC6.E17@82.715,42.384 v1(83.115,41.984)
  Int2 (Sign) w0.127: v1(38.862,51.308) 38.862,50.487 35.65,47.275 35.65,44.05 36.475,43.225 36.475,41.352 36.49,41.337 36.49,41.013 36.475,40.998 36.475,40.452 36.49,40.437 36.49,40.113 36.475,40.098 36.475,36.775 40.475,32.775 40.475,30.9 42.95,28.425 52.325,28.425 55,31.1 58.553,31.1 59.225,31.772 59.225,32.375 61.15,34.3 61.15,35.575 63.673,38.098 65.077,38.098 65.353,38.375 68.077,38.375 68.101,38.35 68.45,38.35 68.475,38.375 71.258,38.375 71.505,38.622 71.505,38.98 71.775,39.25 78.65,39.25 79.505,40.105 79.505,41.327 79.772,41.594 81.317,41.594 81.708,41.984 v1(83.115,41.984)
SPI6_NSS: IC6.E14 IC9.93 | length 68.2
  Top Layer w0.127: IC9.93@26.96,62.996 26.962,62.994 28.573,62.994 v1(28.575,62.992) ; v1(57.725,51.725) 57.725,50.15 59.95,47.925 63.125,47.925 64.45,46.6 64.45,45.825 65.1,45.175 82.324,45.175 IC6.E14@82.715,44.784
  Int2 (Sign) w0.127: v1(28.575,62.992) 28.325,62.742 28.325,60.275 28.675,59.925 42.95,59.925 45.85,57.025 45.85,56.625 48.15,54.325 51.829,54.325 52.175,54.671 55.246,54.671 55.363,54.789 56.336,54.789 56.75,54.375 56.75,52.7 v1(57.725,51.725)
SPI6_SCK: IC6.A12 IC9.41 | length 95.6
  Top Layer w0.127: v1@43.939,76.324 v1(43.942,76.327) 44.435,75.834 IC9.41@44.435,74.971 ; IC6.A12@85.915,46.384 85.937,46.384 86.303,46.75 v1(86.325,46.75)
  Layer 1 w0.127: v1(43.942,76.327) 47.515,79.9 59.175,79.9 65.4,86.125 72.675,86.125 73.15,85.65 73.15,83.975 65.65,76.475 65.65,54.775 66.724,53.701 66.724,51.422 66.972,51.175 67.753,51.175 71.5,51.175 71.515,51.16 75.262,51.16 75.277,51.175 78.8,51.175 79.15,50.825 79.35,50.825 79.736,50.439 80.536,50.439 80.563,50.465 80.887,50.465 82.691,48.662 82.691,47.71 82.735,47.666 82.735,47.444 82.963,47.215 85.86,47.215 v1(86.325,46.75)
STRIP1: R289.1 | length 1.2
  Top Layer w0.5: R289.1@43.392,3.817 v2(44.583,3.817)
  other v2: 210.78,1.575 120.65,1.625
STRIP2: R287.1 | length 2.4
  Top Layer w0.127: 69.25,1.55 69.258,1.558 R287.1@69.258,3.959
  other v2: 99.465,1.543 45.55,1.625
SYSEN_N: D5.4 IC9.76 R204.1 R300.1 | length 218.1
  Top Layer w0.127: v1(21.514,43.104) 21.488,43.129 21.488,49.276 23.419,51.206 25.451,51.206 31.115,56.871 31.115,69.342 28.961,71.496 IC9.76@26.96,71.496 25.329,71.496 24.765,72.06 R300.1@24.765,72.58 ; R204.1@176.104,10.384 177.234,10.384 D5.4@177.384,10.234 v1(178.16,10.234)
  Int2 (Sign) w0.127: v1(21.514,43.104) 21.514,40.411 21.819,40.107 23.293,40.107 37.775,25.625 37.775,24.5 41.193,21.082 53.442,21.082 61.9,12.624 v1(69.469,12.624)
  Layer 1 w0.127: v1(69.469,12.624) 70.088,12.005 102.701,12.005 102.733,12.037 136.743,12.037 137.152,12.446 159.664,12.446 163.601,16.383 172.72,16.383 178.16,10.943 v1(178.16,10.234)
TCK: D28.3 IC9.109 J8.4 R30.2 | length 62.2
  Top Layer w0.127: v1(27.746,50.546) 27.694,50.598 27.694,50.926 27.686,50.934 27.686,51.131 28.531,51.975 R30.2@28.551,51.975 28.571,51.975 28.935,52.34 IC9.109@28.935,53.521 ; v1(43.053,13.462) 43.053,15.24 44.196,16.383 44.196,17.164 D28.3@44.15,17.21 44.15,17.988 45.593,19.431 48.387,19.431 48.695,19.123 J8.4@48.695,17.754
  Bottom Layer w0.127: v1(27.746,50.546) 27.746,50.486 28.524,49.708 28.524,25.502 28.475,25.453 28.475,24.585 28.524,24.536 28.524,24.435 34.671,18.288 34.671,15.748 36.957,13.462 v1(43.053,13.462)
TD_N: J7.8 R220.2 | length 12.5
  Top Layer w0.095: J7.8@14.93,22.07 14.93,23.151 14.874,23.207 13.904,23.207 13.623,23.207 13.396,23.434 13.396,25.636 14.034,26.274 15.527,26.274 18.624,23.177 18.949,23.177 19.005,23.232 19.005,23.313 R220.2@19.247,23.556
TD_P: J7.10 R199.2 | length 11.7
  Top Layer w0.095: J7.10@14.93,24.61 14.93,23.529 14.874,23.474 13.793,23.474 13.734,23.474 13.663,23.545 13.663,25.525 14.145,26.007 15.416,26.007 18.513,22.91 18.949,22.91 19.005,22.854 19.005,22.773 R199.2@19.247,22.531
TDI: D28.1 IC9.110 J8.8 R33.2 | length 61.8
  Top Layer w0.127: IC9.110@29.435,53.521 29.435,52.019 R33.2@29.479,51.975 29.499,51.975 30.099,51.375 v1(30.099,50.546) ; D28.1@45.45,17.21 45.466,17.194 v1(45.466,16.256) ; v1(47.117,15.621) 50.419,15.621 51.235,16.437 J8.8@51.235,17.754
  Bottom Layer w0.127: v1(30.099,50.546) 30.099,41.964 30.353,41.71 30.353,38.874 30.076,38.597 30.076,32.467 29.81,32.2 29.81,26.07 28.983,25.243 28.983,24.795 29.3,24.478 29.716,24.478 32.64,21.554 33.056,21.554 35.941,18.669 35.941,15.494 37.121,14.314 43.5,14.314 45.443,16.256 46.482,16.256 v1(47.117,15.621)
TDO: D28.6 IC9.133 J8.6 R31.2 | length 50.4
  Top Layer w0.127: IC9.133@40.935,53.521 40.935,51.878 42.095,50.718 42.095,50.48 v1(42.125,50.45) ; D28.6@45.466,14.994 D28.6@45.45,15.01 45.871,15.01 46.99,16.129 49.657,16.129 49.965,16.437 49.965,17.754 49.965,21.536 v1(48.057,23.444)
  Bottom Layer w0.127: v1(42.125,50.45) 42.125,49.859 42.704,49.28 42.704,47.382 42.526,47.205 42.526,45.627 37.8,40.901 37.8,32.992 41.9,28.892 42.609,28.892 v1(48.057,23.444)
THERM_SCL: IC4.2 IC5.2 IC18.6 R211.2 R216.1 | length 118.3
  Top Layer w0.127: v1(44.1,79) 47.775,82.675 51.925,82.675 55.098,79.502 79.629,79.502 86.106,85.979 91.313,85.979 92.7,87.366 92.7,88.12 92.774,88.194 IC4.2@93.767,88.194 95.471,88.194 R216.1@95.542,88.265 ; R211.2@46.228,30.518 46.248,30.518 46.474,30.292 46.474,30.272 46.8,29.946 v1(46.8,29.6) ; v1(49.6,48.1) 50.202,47.498 52.197,47.498 52.451,47.244 52.451,46.482 52.268,46.299 IC5.2@51.267,46.299
  Bottom Layer w0.127: v1(44.1,79) 43.18,78.08 43.18,75.946 44.45,74.676 44.45,70.866 45,70.316 45,57.604 45.855,56.749 45.855,51.845 v1(49.6,48.1) 49.6,47.1 48.2,45.7 48.2,34.342 46.8,32.942 v1(46.8,29.6)
THERM_SDA: IC4.1 IC5.1 IC18.5 R210.2 R215.1 | length 116.6
  Top Layer w0.127: v1(42.625,77.425) 43.3,77.425 47.9,82.025 IC18.5@49.9,82.025 50.915,82.025 54.2,78.74 80.01,78.74 86.741,85.471 91.694,85.471 93.218,86.995 93.218,87.382 93.38,87.544 IC4.1@93.767,87.544 93.929,87.382 94.736,87.382 94.869,87.249 R215.1@95.542,87.249 ; R210.2@45.053,30.486 R210.2@45.085,30.518 45.105,30.518 45.331,30.292 45.331,30.272 45.568,30.035 v1(45.635,30.035) ; v1(46.491,47.498) 46.491,47.424 46.499,47.432 46.603,47.432 46.702,47.333 47.867,47.333 48.251,46.949 IC5.1@51.267,46.949
  Bottom Layer w0.127: v1(42.625,77.425) 42.291,77.091 42.291,75.565 43.434,74.422 43.434,74.296 43.708,74.022 43.708,68.351 44.205,67.854 44.205,51.895 45.1,51 45.1,50 46.491,48.609 v1(46.491,47.498) 45.8,46.807 45.8,40.7 44.6,39.5 44.6,35.567 45.2,34.967 45.2,30.4 45.565,30.035 v1(45.635,30.035)
TMS: D28.4 IC9.105 J8.2 R16.2 | length 64.6
  Top Layer w0.127: R16.2@25.394,56.996 28.862,56.996 28.949,57.083 v1(29.023,57.083) ; v1(44.069,13.589) 44.069,14.928 D28.4@44.15,15.01 44.15,15.801 44.225,15.875 45.33,15.875 45.339,15.866 45.628,15.866 46.38,16.618 47.119,16.618 47.425,16.924 J8.2@47.425,17.754
  Bottom Layer w0.127: v1(29.023,57.083) 29.023,53.706 29.083,53.645 29.074,53.636 29.074,41.507 28.983,41.417 28.983,25.602 28.729,25.348 28.729,24.69 29.195,24.224 29.37,24.224 35.179,18.415 35.179,15.621 36.74,14.06 43.598,14.06 v1(44.069,13.589)
USART3_RX: D12.6 IC9.78 W1.2 | length 29
  Top Layer w0.127: W1.2@25.568,92.917 25.568,91.257 27.95,88.875 D12.6@27.95,87.975 27.814,87.839 27.814,87.514 26.775,86.475 26.775,84.05 26.175,83.45 24.625,83.45 23.193,82.018 23.193,72.311 25.008,70.496 IC9.78@26.96,70.496
USART3_TX: D12.4 IC9.77 W1.3 | length 28.6
  Top Layer w0.127: IC9.77@26.96,70.996 25.27,70.996 23.622,72.644 23.622,81.547 24.7,82.625 25.875,82.625 27.375,84.125 27.375,86.425 27.575,86.625 28.925,86.625 29.25,86.95 D12.4@29.25,87.975 29.25,90.475 28.108,91.617 W1.3@28.108,92.917
USB_N: D22.4 IC9.103 L9.2 | length 55.3
  Top Layer w0.095: L9.2@19.03,13.215 19.03,13.465 18.878,13.617 18.819,13.617 18.764,13.673 18.764,14.05 18.864,14.15 19.14,14.15 19.837,13.453 20.264,13.453 20.395,13.322 v1(20.472,13.322) D22.4@20.472,12.445 ; v1(22.852,58.369) 22.907,58.314 22.907,58.13 23.157,57.88 26.227,57.88 26.344,57.996 IC9.103@26.96,57.996
  Layer 1 w0.102: v1(20.472,13.322) 20.524,13.322 20.681,13.479 21.431,13.479 23.35,15.397 23.35,57.649 22.889,58.111 22.889,58.332 v1(22.852,58.369)
USB_P: D22.3 IC9.104 L9.3 | length 55.3
  Top Layer w0.095: L9.3@18.23,13.215 18.23,13.465 18.383,13.617 18.441,13.617 18.497,13.673 18.497,14.161 18.753,14.417 19.251,14.417 19.948,13.72 20.265,13.72 20.396,13.851 v1(20.473,13.851) D22.3@20.473,14.574 ; v1(22.479,57.996) 22.534,57.941 22.718,57.941 23.046,57.613 26.227,57.613 26.344,57.496 IC9.104@26.96,57.496
  Layer 1 w0.102: v1(20.473,13.851) 20.524,13.851 20.682,13.693 21.343,13.693 23.136,15.486 23.136,57.561 22.737,57.959 22.516,57.959 v1(22.479,57.996)
USBJ_N: J9.2 L9.1 | length 20.8
  Top Layer w0.095: v1(18.917,12.192) 18.917,11.628 L9.1@19.03,11.515
  Bottom Layer w0.095: J9.2@2.89,18.25 3.315,18.25 3.507,18.442 6.092,18.442 8.233,16.3 8.233,15.289 12.089,11.433 18.481,11.433 18.786,11.739 18.786,11.984 18.917,12.114 v1(18.917,12.192)
USBJ_P: J9.3 L9.4 | length 20.4
  Top Layer w0.095: L9.4@18.23,11.515 18.383,11.667 18.383,12.185 v1(18.39,12.192)
  Bottom Layer w0.095: J9.3@2.89,18.9 3.315,18.9 3.507,18.708 6.202,18.708 8.5,16.411 8.5,15.4 12.2,11.7 18.37,11.7 18.52,11.849 18.52,11.984 18.39,12.114 v1(18.39,12.192)
pads on no net: D2.3 D6.4 D6.6 D9.6 D12.1 D12.3 D13.6 D14.1 D14.3 D15.4 D15.6 D16.1 D16.3 D16.4 D22.1 FTG1.FTG2 FTG2.1 FTG3.1 FTG4.1 FTG5.FTG2 FTG6.FTG2 IC1.7 IC6.AA3 IC6.AA4 IC6.AA5 IC6.AA25 IC6.AD7 IC6.AD8 IC6.AD10 IC6.AD11 IC6.AD13 IC6.AD14 IC6.AD16 IC6.AD17 IC6.AD19 IC6.AD20 IC6.AD22 IC6.AD23 IC6.C12 IC6.C15 IC6.D12 IC6.D15 IC6.F8 IC6.F9 IC6.F10 IC6.F12 IC6.F13 IC6.F14 IC6.F15 IC6.F17 IC6.F18 IC6.F19 IC7A.17 IC7A.44 IC7B.17 IC7B.44 IC7C.17 IC7C.44 IC7D.17 IC7D.44 IC7E.17 IC7E.44 IC7F.17 IC7F.44 IC9.49 IC9.116 IC9.118 IC12A.17 IC12A.44 IC12B.17 IC12B.44 IC12C.17 IC12C.44 IC12D.17 IC12D.44 IC12E.17 IC12E.44 IC12F.17 IC12F.44 IC13.11 IC13.12 IC14.9 IC16.5 IC16.8 J6.12 J6.14 J6.15 J6.16 J7.1 J7.2 J7.6 J7.7 J7.MH1 J7.MH2 J8.7 J12.A1 J12.A3 J12.A5 J12.A7 J12.B1 J12.B3 J12.B5 J12.B7 J12.D1 J12.D3 J12.D5 J12.D7 J12.E1 J12.E3 J12.E5 J12.E7 J14.A5 J14.B5 J14.D5 J14.E4 J14.E5 J14.F4 J14.K2 J31.A1 J31.A3 J31.B1 J31.B3 J31.D1 J31.D3 J31.E1 J31.E3 J33.A1 J33.A3 J33.B1 J33.B2 J33.B3 J33.C2 J33.D1 J33.D3 J33.E1 J33.E2 J33.E3 J33.F2 J33.G1 J33.H1 J33.H2 J33.I2 J33.J1 J33.K1 J33.K2 J33.L2

## Polygon pours and split planes (outlines as drawn)
no net on Int2 (Sign) "bal_int2" (solid, pour order 17): 1,3 1,9 -2,12 -2,89 1,92 1,97 197,97 197,3
P12V0 on Int2 (Sign) "P12V0_L03_P006" (solid, remove dead copper, pour order 6): 218.982,5.994 218.982,2.994 161.732,2.994 161.732,8.994 199.232,8.994 202.232,5.994
P1V1 on Int2 (Sign) "P1V1_L03_P000" (solid, remove dead copper, pour order 0): 70.625,50.544 53.744,50.544 48.031,44.831 42.931,44.831 42.1,44 42.1,31.8 43.547,30.353 51.053,30.353 60.07,39.37 76.47,39.37 79.7,42.6 79.7,47.8 77.578,49.922 71.247,49.922
AVDDT_PHY on Int2 (Sign) "AVDDT_PHY_L03_P003" (solid, remove dead copper, pour order 3): 10.922,24.61 30.381,24.61 34.798,20.193 34.798,12.192 33.528,10.922 13.056,10.922 10.541,13.437 10.541,24.229
no net on Layer 1 "bal_l1" (solid, pour order 18): 1,3 1,9 -2,12 -2,89 1,92 1,97 197,97 197,3
P12V0 on Layer 1 "P12V0_L04_P004" (solid, remove dead copper, pour order 4): 41.7,34.671 42.139,35.11 42.139,37.44 41.7,37.871 34.417,37.871 34.417,19.431 51.054,2.794 219.075,2.794 219.075,5.588 218.821,5.842 195.834,5.842 193.04,8.636 177.419,8.636 173.99,12.065 60.935,12.065 41.7,31.3
P2V5 on Layer 1 "P2V5_L04_P001" (solid, remove dead copper, pour order 1): 79.225,50.25 79.537,49.937 81.026,48.449 81.026,47.371 81.026,44.58 81.026,44.237 81.026,41.651 79.475,40.1 64.611,40.1 63.373,38.862 48.895,38.862 48.895,42.291 56.854,50.25
no net on Bottom Layer "bal_bot" (solid, pour order 19): 1,3 1,9 -2,12 -2,89 1,92 1,97 197,97 197,3
GND on Bottom Layer "GND_L06_P016" (solid, remove dead copper, pour order 16): 202.011,52.7 202.011,46.775 219.786,46.775 219.786,52.7
P12V0 on Bottom Layer "P12V0_L06_P005" (solid, remove dead copper, pour order 5): 219,6 219,3 161.75,3 161.75,7.75 200.5,7.75 202.25,6
CHASSIS on Bottom Layer "NONET_L04_P-001" (solid, remove dead copper, pour order 14): 0.391,8.84 0.391,2.15 7.38,2.15 7.38,8.85 7.37,8.85
STRIP2 on Bottom Layer "esd1" (solid, pour order 12): 82.963,1 100.03,1 100.03,2.269 45.03,2.269 45.03,1
STRIP1 on Bottom Layer "STRIP1_L06_P011" (solid, pour order 11): 217.563,1 217.58,1 218.82,2.24 120.03,2.24 120.03,1
CHASSIS on Bottom Layer "esd1" (solid, pour order 10): 0.349,2.27 40.03,2.27 40.03,1.05 0.349,1.05
no net on Top Layer "bal_top" (solid, pour order 20): 1,3 1,9 -2,12 -2,89 1,92 1,97 197,97 197,3
GND on Top Layer "GND_L01_P015" (solid, remove dead copper, pour order 15): 202.011,52.7 202.011,46.775 219.786,46.775 219.786,52.7
CHASSIS on Top Layer "NONET_L04_P-001" (solid, remove dead copper, pour order 13): 0.391,2.16 0.391,8.84 7.38,8.84 7.38,2.19
STRIP2 on Top Layer "STRIP2_L01_P009" (solid, pour order 9): 82.963,1 100.03,1 100.03,2.28 45.03,2.28 45.03,1
STRIP1 on Top Layer "esd1" (solid, pour order 8): 217.563,1 217.58,1 218.82,2.24 120.03,2.24 120.03,1
CHASSIS on Top Layer "esd1" (solid, pour order 7): 0.349,2.28 40.03,2.28 40.03,1.05 0.349,1.05
P2V5 on Int1 (GND) (split plane): 193.346,77.421 193.346,77.329 192.921,76.904 190.779,76.904 190.542,77.142 190.5,77.17 190.45,77.179 187.125,77.179 187.075,77.17 187.033,77.142 186.883,76.992 186.855,76.95 186.846,76.9 186.846,72.675 186.855,72.625 186.883,72.583 187.396,72.071 187.396,71.029 187.196,70.829 186.904,70.829 186.679,71.054 186.679,72.175 186.67,72.225 186.642,72.267 186.004,72.904 186.004,74.925 185.995,74.975 185.967,75.017 185.442,75.542 185.4,75.57 185.35,75.579 180.279,75.579 180.129,75.729 180.129,77.971 182.971,77.971 183.658,77.283 183.7,77.255 183.75,77.246 184.375,77.246 184.425,77.255 184.467,77.283 184.817,77.633 185.229,78.046 192.721,78.046
GND on Int1 (GND) (split plane): 166 vertices, not listed, extent 68.179,0.51 219.528,99.483
P3V3 on Int1 (GND) (split plane): 207 vertices, not listed, extent -1.979,0.51 137.158,99.489
STRIP1 on Layer 2 (split plane): 45.498,3.983 45.498,2.55 45.506,2.511 45.528,2.478 45.561,2.456 45.6,2.448 210,2.448 210.039,2.456 210.072,2.478 210.094,2.511 210.102,2.55 210.102,3.373 211.498,3.373 211.498,0.51 42.952,0.51 42.952,3.608 43.942,4.598 44.883,4.598
GND on Layer 2 (split plane): 217.828,99.48 219.528,97.779 219.528,2.202 217.828,0.51 211.702,0.51 211.702,3.475 211.694,3.514 211.672,3.547 211.639,3.569 211.6,3.577 210.025,3.577 209.986,3.569 209.953,3.547 209.928,3.522 209.906,3.489 209.898,3.45 209.898,2.652 45.702,2.652 45.702,4.025 45.694,4.064 45.672,4.097 44.997,4.772 44.964,4.794 44.925,4.802 43.9,4.802 43.861,4.794 43.828,4.772 42.778,3.722 42.756,3.689 42.748,3.65 42.748,0.51 0.51,0.51 0.51,8.32 0.501,8.419 0.472,8.515 0.424,8.603 0.361,8.681 -1.979,11.02 -1.979,14.45 1.689,14.45 1.789,14.46 1.885,14.489 1.973,14.536 2.05,14.6 2.081,14.637 2.162,14.645 2.258,14.674 2.346,14.721 2.423,14.785 2.487,14.862 2.534,14.95 2.563,15.046 2.573,15.145 2.573,22.645 2.563,22.745 2.534,22.841 2.487,22.929 2.423,23.006 2.346,23.07 2.258,23.117 2.162,23.146 2.062,23.156 2.037,23.156 1.973,23.208 1.885,23.255 1.789,23.284 1.689,23.294 -1.979,23.294 -1.979,89.299 0.361,91.639 0.424,91.716 0.472,91.805 0.501,91.9 0.51,92 0.51,99.489

## Keep-outs
KeepOutLayer:
  region: 206.048,48.55 219.486,48.55 219.486,51.45 206.048,51.45
  lines w0.2: 0,2.54 0,10.19 0.375,10.565 0.375,29 3.71,29 4,29.29 ; 2.2,97.44 0,97.44 0,90.74 4,90.74 ; 5.2,97.44 164.675,97.44 ; 6,31.29 6,36.79 ; 7.675,2.565 37.3,2.565 ; 38.7,2.575 68.5,2.575 ; 70,2.575 164,2.575 ; 167.325,2.565 170.175,2.565 ; 167.825,97.44 219.489,97.44 220.039,96.89 220.039,2.54 211.65,2.54 ; 171.625,2.565 209.95,2.565

## Other copper
Top Layer:
  rectangle net STRIP2: 68.78,1.78 69.77,3.33
  rectangle net CHASSIS: 37.65,1.925 38.425,3.275
  rectangle net P3V3: 59.919,48.819 63.449,50.673
  rectangle net GND: 59.919,51.664 63.449,53.518
  rectangle net P2V5: 59.919,39.141 63.449,40.996
  rectangle net P1V1: 59.919,42.443 63.449,44.298
  rectangle net GND: 59.919,45.314 63.449,47.168
  region net P12V0: 38.227,37.719 38.43,37.922 43.053,37.922 43.053,36.881 42.951,36.779 38.227,36.779
  region net P3V3: 49.428,36.6 49.96,36.6 51.46,38.1 59.207,38.1 59.766,37.541 59.766,34.966 59.192,34.392 51.208,34.392 49.964,35.636 49.428,35.636
  region net P1V1: 44.9,41 41.8,41 41.6,41.2 41.7,41.3 41.7,44.1 44.4,44.1 44.9,43.6
  region net P1V1: 42.02,35.1 41.6,34.68 41.6,30.6 43.3,30.6 44.859,32.159 44.859,35.1
  region net P2V5: 50.546,41.148 49.911,40.513 49.784,40.513 49.784,39.497 54,39.497 54,41.148
Layer 2 (plane layer: these items are gaps in the copper):
  lines w0.2: 42.85,0.075 42.85,3.65 43.9,4.7 44.925,4.7 45.6,4.025 45.6,2.55 210,2.55 210,3.45 210.025,3.475 211.6,3.475 211.6,0.25 211.55,0.2
Int1 (GND) (plane layer: these items are gaps in the copper):
  pour cut-out: -2.21,22.987 1.514,22.987 1.753,22.748 1.753,14.834 1.491,14.572 -2.128,14.572 -2.211,14.655
  lines w0.254: 74.287,21.463 69.95,25.8 69.95,35.65 71.5,37.2 71.55,37.2 79.125,37.2 81.025,39.1 82.625,39.1 82.75,39.225 ; 74.3,21.475 87.875,21.475 102.8,6.55 110.875,6.55 111.7,5.725 113.125,5.725 113.125,11.4 112.15,12.375 109,12.375 108.95,12.325 105.35,12.325 105.35,16.225 106.125,17 113.1,17 113.125,17.025 113.125,23.5 113.1,23.525 113.1,26.15 134.5,26.15 ; 76.475,78.225 80.325,78.225 87.2,85.1 94.8,85.1 97.875,88.175 97.875,89.65 101.9,93.675 112.825,93.675 113,93.5 113,88.5 112,88.5 105.5,88.5 105.5,84 113,84 113,77 105.5,77 105.5,72.5 113,72.5 113,65.5 105.5,65.5 105.5,61 113,61 113,53.5 104.5,53.5 104.5,52 105.575,50.925 106.25,50.925 ; 76.475,78.25 68.05,69.825 68.05,61.025 70.125,58.95 70.125,54.45 71.15,53.425 81.2,53.425 84.225,50.4 84.225,49.225 83.55,48.55 83.55,47.9 84.725,46.725 84.725,45.2 83.525,44 83.525,39.975 82.725,39.175 ; 105.723,50.927 135.255,50.927 137.287,52.959 137.287,96.012 133.477,99.822 ; 134.493,26.162 137.033,23.622 137.033,0.127 ; 180,75.675 180,78.1 183.025,78.1 183.75,77.375 184.375,77.375 184.725,77.725 185.175,78.175 192.775,78.175 193.475,77.475 193.475,77.275 192.975,76.775 190.725,76.775 190.45,77.05 187.125,77.05 186.975,76.9 186.975,72.675 187.525,72.125 187.525,70.975 187.25,70.7 186.85,70.7 186.55,71 186.55,72.175 185.875,72.85 185.875,74.925 185.35,75.45 180.225,75.45 180,75.675